# Altium PCB msr50.PcbDoc (part 5 of 8)
Units mil, origin at the board's own origin, x right, y up, seen from the top; angles counter-clockwise.
Board outline 3925 x 3925 mil, 2 copper layers (TopLayer, BottomLayer); 109 components, 122 nets, 846 pads, 52 vias.
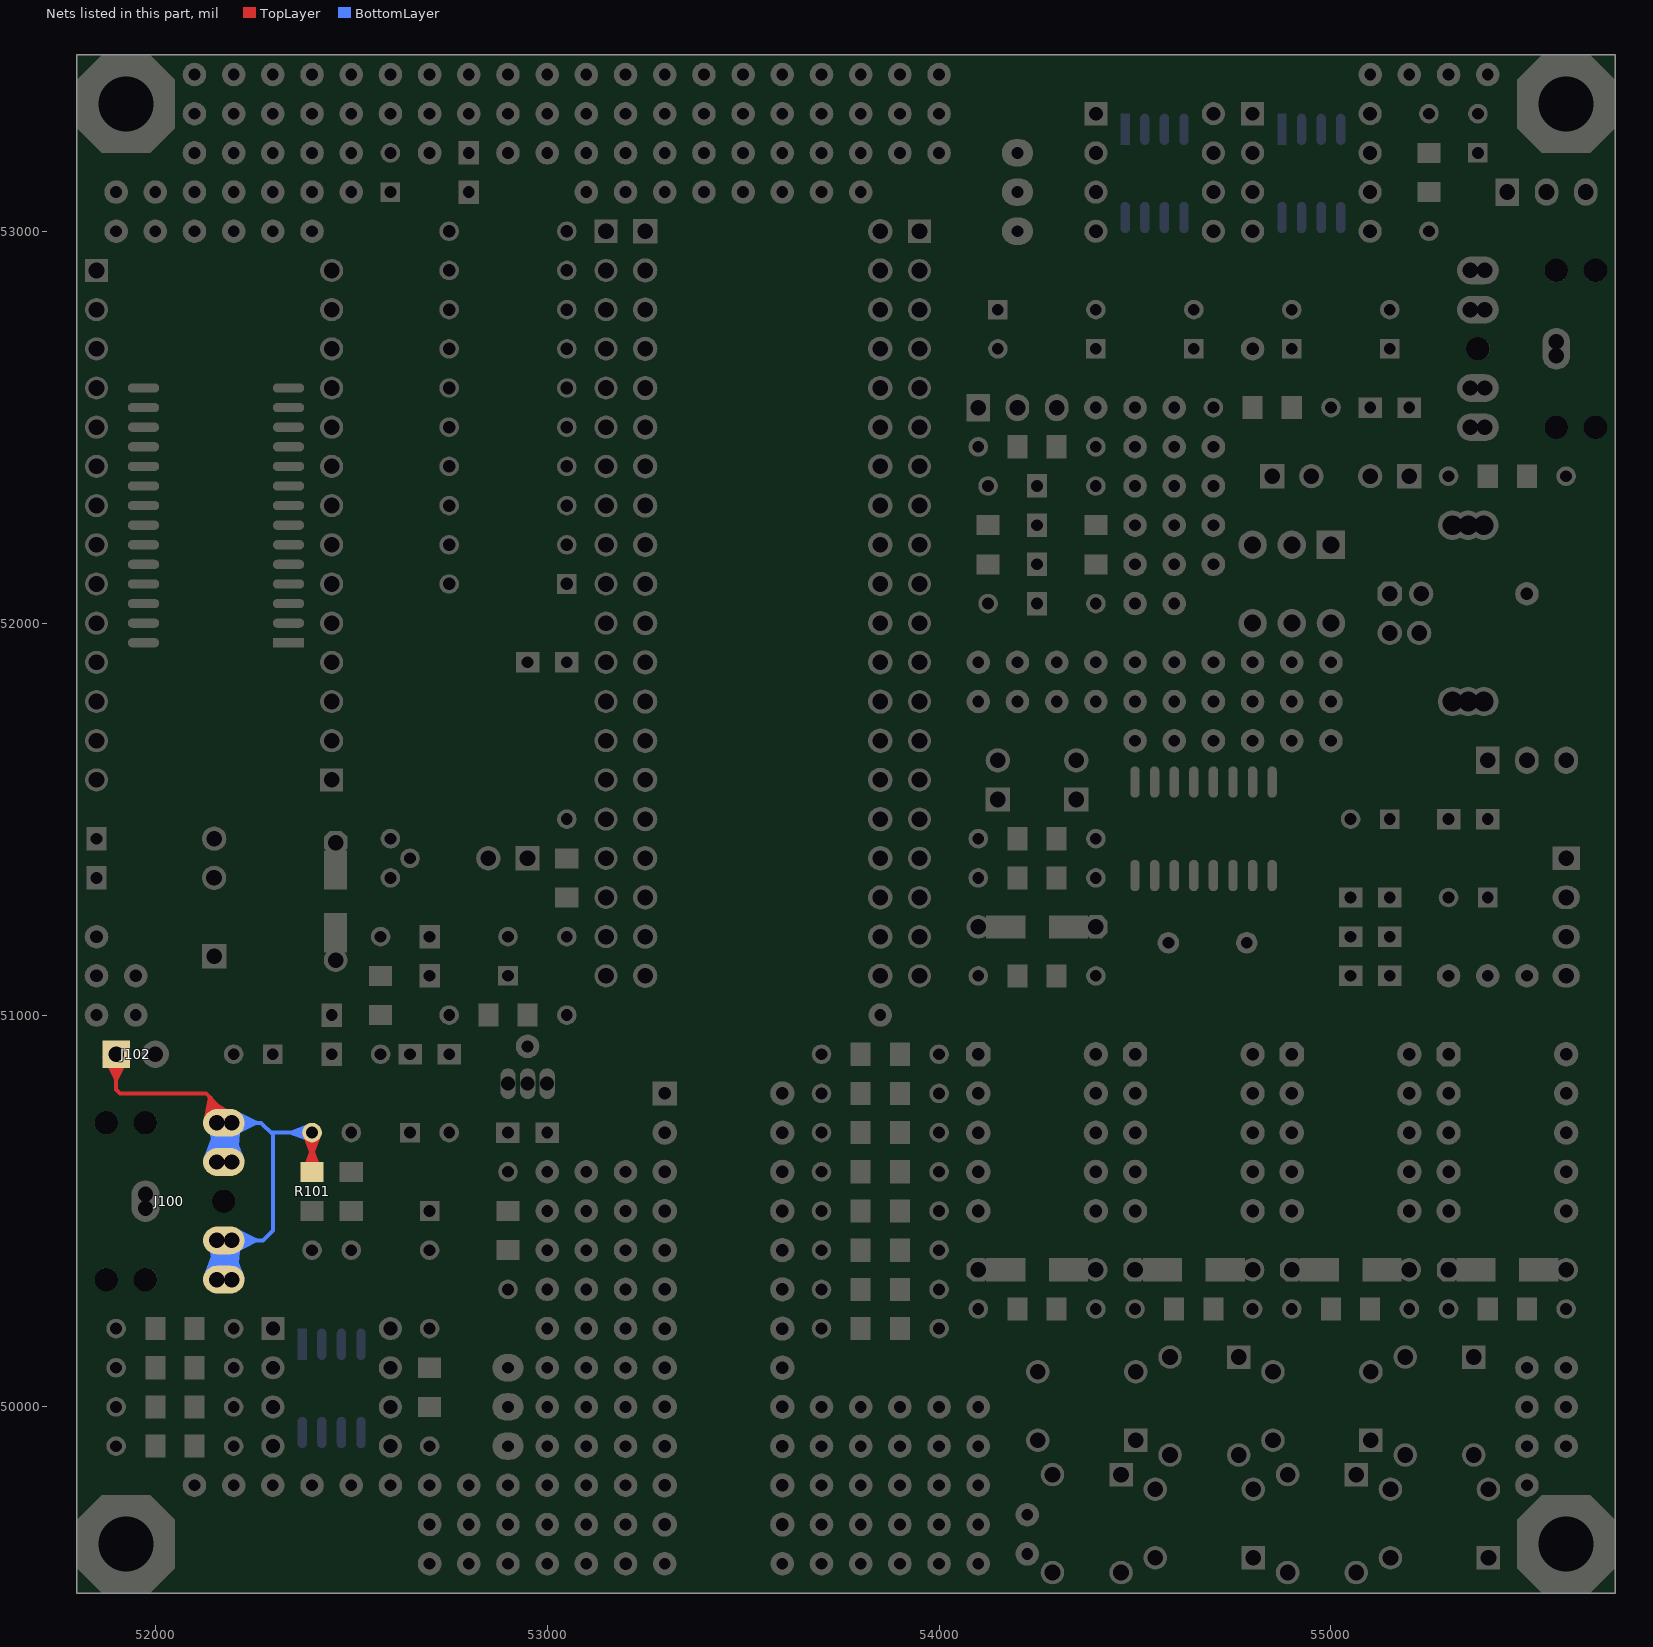
[diagram p5: the nets of this part, all layers, seen from the top]

## Via types
v1: diameter 30, hole 14, TopLayer to BottomLayer, 40 vias
v2: diameter 50, hole 28, TopLayer to BottomLayer, 12 vias

## Nets (pads, with @x,y where several pads share a name; then routed paths per layer and width w, separated by ;. In a path a pad name is that pad's centre, name@x,y a point inside that pad or via, vN(x,y) a via of type N, cw(c..) or ccw(c..) an arc to the next point about the centre after c; other vN are vias at no path point) (continued)
NetJ100_2: (continued)
  BottomLayer w10: J100.3@52186.39,50625.5 J100.2@52195.23,50702.91 ; J100.3@52186.4,50625.6 52194.45,50678.71 ; J100.2@52186.41,50724.23 52196.16,50664.11 ; J100.2@52186.38,50724.99 52190.73,50665.44 ; J100.2@52186.38,50725.16 52189.67,50669.78 ; J100.2@52186.38,50725.32 J100.3@52188.22,50658.46 ; J100.2@52186.41,50725.72 52185.83,50667.34 ; J100.2@52186.42,50725.89 52184.78,50668.55 ; J100.5@52186.45,50326.09 52197.6,50379.7 ; J100.4@52186.47,50423.76 52198.51,50370.79 ; J100.4@52186.45,50426.12 J100.5@52182.09,50359.79 ; J100.3@52186.45,50626.09 52197.6,50679.7 ; J100.2@52186.47,50723.76 52198.51,50670.79 ; J100.2@52186.45,50726.12 J100.3@52182.09,50659.79 ; J100.5@52186.5,50323.53 52180.99,50380.64 ; J100.5@52186.48,50326.33 52199.76,50383.59 ; J100.4@52186.5,50426.44 52181.3,50369.77 ; J100.3@52186.5,50623.53 52180.99,50680.64 ; J100.3@52186.48,50626.33 52199.76,50683.59 ; J100.2@52186.5,50726.44 52181.3,50669.77 ; J100.5@52186.53,50323.37 52180.25,50378.8 ; J100.4@52186.54,50426.67 52179.36,50367.87 ; J100.3@52186.53,50623.37 52180.25,50678.8 ; J100.2@52186.54,50726.67 52179.36,50667.87 ; J100.5@52186.61,50323.03 52176.96,50382.89 ; J100.5@52186.6,50323.08 52178.6,50377.34 ; J100.4@52186.59,50423.11 52203.09,50369.42 ; J100.4@52186.59,50426.91 52176.25,50361.98 ; J100.3@52186.61,50623.03 52176.96,50682.89 ; J100.3@52186.6,50623.08 52178.6,50677.34 ; J100.2@52186.59,50723.11 52203.09,50669.42 ; J100.2@52186.59,50726.91 52176.25,50661.98 ; J100.4@52186.77,50422.42 52208.23,50368.44 ; J100.2@52186.77,50722.42 52208.23,50668.44 ; J100.4@52186.78,50422.41 J100.4@52199.79,50395.4 ; J100.4@52186.78,50427.59 J100.4@52199.79,50454.6 ; J100.2@52186.78,50722.41 J100.2@52199.79,50695.4 ; J100.2@52186.78,50727.59 J100.2@52199.79,50754.6 ; J100.5@52192.72,50325 J100.4@52195.23,50402.91 ; J100.4@52192.72,50425 52258.15,50425 ; J100.3@52192.72,50625 J100.2@52195.23,50702.91 ; J100.2@52192.72,50725 52258.15,50725 ; J100.4@52193.55,50414.6 52258.15,50425 ; J100.4@52193.55,50435.4 52258.15,50425 ; J100.2@52193.55,50714.6 52258.15,50725 ; J100.2@52193.55,50735.4 52258.15,50725 ; J100.5@52193.78,50333.05 J100.4@52157.28,50392.23 ; J100.4@52193.78,50416.95 J100.5@52157.28,50357.77 ; J100.3@52193.78,50633.05 J100.2@52157.28,50692.23 ; J100.2@52193.78,50716.95 J100.3@52157.28,50657.77 ; J100.5@52193.9,50332.76 J100.4@52155.75,50398.74 ; J100.3@52193.9,50632.76 J100.2@52155.75,50698.74 ; J100.5@52194.53,50331 J100.4@52162.05,50401.91 ; J100.3@52194.53,50631 J100.2@52162.05,50701.91 ; J100.5@52194.79,50333.62 J100.5@52222.74,50329.98 ; J100.3@52194.79,50633.62 J100.3@52222.74,50629.98 ; J100.5@52195.03,50329.03 J100.4@52169.49,50404.1 ; J100.3@52195.03,50629.03 J100.2@52169.49,50704.1 ; J100.5@52195.34,50326.92 J100.4@52177.71,50405.04 ; J100.3@52195.34,50626.92 J100.2@52177.71,50705.04 ; J100.4@52195.41,50416.39 52253.35,50423.44 ; J100.4@52195.41,50433.61 52253.35,50426.56 ; J100.2@52195.41,50716.39 52253.35,50723.44 ; J100.2@52195.41,50733.61 52253.35,50726.56 ; J100.5@52195.43,50324.75 J100.4@52186.2,50404.66 ; J100.4@52195.47,50416.39 52249.97,50423.68 ; J100.4@52195.47,50433.61 52249.97,50426.32 ; J100.3@52195.43,50624.75 J100.2@52186.2,50704.66 ; J100.2@52195.47,50716.39 52249.97,50723.68 ; J100.2@52195.47,50733.61 52249.97,50726.32 ; J100.4@52195.53,50433.61 52257.25,50425.46 ; J100.2@52195.53,50733.61 52257.25,50725.46 ; J100.4@52195.59,50416.4 52258.15,50425 ; J100.4@52195.59,50433.6 52258.15,50425 ; J100.2@52195.59,50716.4 52258.15,50725 ; J100.2@52195.59,50733.6 52258.15,50725 ; J100.4@52195.66,50416.4 52257.25,50425.46 ; J100.2@52195.66,50716.4 52257.25,50725.46 ; J100.4@52195.87,50416.42 52253.35,50426.56 ; J100.4@52195.87,50433.58 52253.35,50423.44 ; J100.2@52195.87,50716.42 52253.35,50726.56 ; J100.2@52195.87,50733.58 52253.35,50723.44 ; J100.4@52195.91,50404.82 52258.15,50425 ; J100.4@52195.88,50416.42 52249.97,50426.32 ; J100.4@52195.88,50433.58 52249.97,50423.68 ; J100.4@52195.91,50445.18 52258.15,50425 ; J100.2@52195.91,50704.82 52258.15,50725 ; J100.2@52195.88,50716.42 52249.97,50726.32 ; J100.2@52195.88,50733.58 52249.97,50723.68 ; J100.2@52195.91,50745.18 52258.15,50725 ; J100.4@52197.48,50406.54 52253.35,50423.44 ; J100.4@52197.48,50443.46 52253.35,50426.56 ; J100.2@52197.48,50706.54 52253.35,50723.44 ; J100.2@52197.48,50743.46 52253.35,50726.56 ; J100.4@52197.65,50443.43 52257.25,50425.46 ; J100.2@52197.65,50743.43 52257.25,50725.46 ; J100.4@52197.71,50406.58 52249.97,50423.68 ; J100.4@52197.71,50443.42 52249.97,50426.32 ; J100.2@52197.71,50706.58 52249.97,50723.68 ; J100.2@52197.71,50743.42 52249.97,50726.32 ; J100.4@52197.75,50406.58 52258.15,50425 ; J100.4@52197.75,50443.42 52258.15,50425 ; J100.2@52197.75,50706.58 52258.15,50725 ; J100.2@52197.75,50743.42 52258.15,50725 ; J100.5@52197.8,50316.85 J100.5@52222.74,50329.98 ; J100.3@52197.8,50616.85 J100.3@52222.74,50629.98 ; J100.4@52197.92,50406.61 52257.25,50425.46 ; J100.2@52197.92,50706.61 52257.25,50725.46 ; J100.5@52197.95,50343.39 J100.5@52222.74,50329.98 ; J100.3@52197.95,50643.39 J100.3@52222.74,50629.98 ; J100.4@52198.46,50406.7 52253.35,50426.56 ; J100.4@52198.46,50443.3 52253.35,50423.44 ; J100.2@52198.46,50706.7 52253.35,50726.56 ; J100.2@52198.46,50743.3 52253.35,50723.44 ; J100.4@52198.59,50406.73 52249.97,50426.32 ; J100.4@52198.59,50443.27 52249.97,50423.68 ; J100.2@52198.59,50706.73 52249.97,50726.32 ; J100.2@52198.59,50743.27 52249.97,50723.68 ; J100.5@52201.83,50330.27 52162.97,50373.58 ; J100.3@52201.83,50630.27 52162.97,50673.58 ; J100.5@52201.92,50330.15 52161.1,50377.77 ; J100.4@52201.92,50419.85 52161.1,50372.23 ; J100.3@52201.92,50630.15 52161.1,50677.77 ; J100.2@52201.92,50719.85 52161.1,50672.23 ; J100.5@52201.93,50330.13 52161.17,50377.99 ; J100.3@52201.93,50630.13 52161.17,50677.99 ; J100.5@52202.02,50330 52164.85,50374.72 ; J100.5@52202.02,50339.01 J100.4@52157.28,50392.23 ; J100.4@52202.02,50410.99 J100.5@52157.28,50357.77 ; J100.4@52202.02,50420 52164.85,50375.28 ; J100.3@52202.02,50630 52164.85,50674.72 ; J100.3@52202.02,50639.01 J100.2@52157.28,50692.23 ; J100.2@52202.02,50710.99 J100.3@52157.28,50657.77 ; J100.2@52202.02,50720 52164.85,50675.28 ; J100.4@52202.06,50420.05 52163.17,50372.15 ; J100.2@52202.06,50720.05 52163.17,50672.15 ; J100.5@52202.08,50329.91 52165.6,50374.94 ; J100.3@52202.08,50629.91 52165.6,50674.94 ; J100.5@52202.25,50329.67 52167.7,50375.34 ; J100.4@52202.25,50420.33 52167.7,50374.66 ; J100.3@52202.25,50629.67 52167.7,50675.34 ; J100.2@52202.25,50720.33 52167.7,50674.66 ; J100.5@52202.31,50329.57 52165.76,50379.83 ; J100.5@52202.32,50338.41 J100.4@52155.75,50398.74 ; J100.3@52202.31,50629.57 52165.76,50679.83 ; J100.3@52202.32,50638.41 J100.2@52155.75,50698.74 ; J100.5@52202.36,50329.5 52169.09,50375.68 ; J100.4@52202.34,50420.48 52168.72,50374.15 ; J100.3@52202.36,50629.5 52169.09,50675.68 ; J100.2@52202.34,50720.48 52168.72,50674.15 ; J100.5@52202.59,50329.09 52170.33,50379.86 ; J100.3@52202.59,50629.09 52170.33,50679.86 ; J100.4@52202.66,50421.04 52173.34,50373.76 ; J100.2@52202.66,50721.04 52173.34,50673.76 ; J100.5@52202.8,50328.68 52174.89,50377.66 ; J100.4@52202.78,50421.28 52171.06,50364.9 ; J100.3@52202.8,50628.68 52174.89,50677.66 ; J100.2@52202.78,50721.28 52171.06,50664.9 ; J100.5@52202.9,50328.45 52175.55,50380.35 ; J100.3@52202.9,50628.45 52175.55,50680.35 ; J100.4@52202.93,50421.63 52177.25,50372.26 ; J100.2@52202.93,50721.63 52177.25,50672.26 ; J100.5@52203,50328.22 52178.6,50377.34 ; J100.3@52203,50628.22 52178.6,50677.34 ; J100.5@52203.03,50328.14 52176.96,50382.89 ; J100.3@52203.03,50628.14 52176.96,50682.89 ; J100.5@52203.11,50327.92 52180.25,50378.8 ; J100.4@52203.09,50422 52176.25,50361.98 ; J100.3@52203.11,50627.92 52180.25,50678.8 ; J100.2@52203.09,50722 52176.25,50661.98 ; J100.5@52203.14,50325.36 J100.4@52195.23,50402.91 ; J100.4@52203.13,50422.12 52179.36,50367.87 ; J100.3@52203.14,50625.36 J100.2@52195.23,50702.91 ; J100.2@52203.13,50722.12 52179.36,50667.87 ; J100.5@52203.18,50327.73 52180.99,50380.64 ; J100.4@52203.19,50422.3 52181.3,50369.77 ; J100.3@52203.18,50627.73 52180.99,50680.64 ; J100.2@52203.19,50722.3 52181.3,50669.77 ; J100.5@52203.27,50327.45 52183.81,50378.01 ; J100.3@52203.27,50627.45 52183.81,50678.01 ; J100.5@52203.31,50327.29 52183.26,50383.76 ; J100.3@52203.31,50627.29 52183.26,50683.76 ; J100.5@52203.37,50327.07 52185.95,50379.6 ; J100.4@52203.33,50422.78 J100.5@52182.09,50359.79 ; J100.4@52203.34,50422.83 52184.78,50368.55 ; J100.3@52203.37,50627.07 52185.95,50679.6 ; J100.2@52203.33,50722.78 J100.3@52182.09,50659.79 ; J100.2@52203.34,50722.83 52184.78,50668.55 ; J100.5@52203.4,50326.94 52186.55,50380.7 ; J100.4@52203.39,50423.02 52185.83,50367.34 ; J100.3@52203.4,50626.94 52186.55,50680.7 ; J100.2@52203.39,50723.02 52185.83,50667.34 ; J100.5@52203.47,50326.61 52189.23,50378.46 ; J100.5@52203.45,50335.81 J100.4@52162.05,50401.91 ; J100.3@52203.47,50626.61 52189.23,50678.46 ; J100.3@52203.45,50635.81 J100.2@52162.05,50701.91 ; J100.5@52203.52,50326.29 52190.1,50386.03 ; J100.4@52203.49,50423.51 52189.67,50369.78 ; J100.4@52203.5,50423.58 J100.5@52188.22,50358.46 ; J100.4@52203.52,50426.34 52208.23,50368.44 ; J100.3@52203.52,50626.29 52190.1,50686.03 ; J100.2@52203.49,50723.51 52189.67,50669.78 ; J100.2@52203.5,50723.58 J100.3@52188.22,50658.46 ; J100.2@52203.52,50726.34 52208.23,50668.44 ; J100.5@52203.55,50326.11 52192.12,50380.56 ; J100.5@52203.54,50326.18 52191.58,50381.19 ; J100.4@52203.53,50423.76 52190.73,50365.44 ; J100.3@52203.55,50626.11 52192.12,50680.56 ; J100.3@52203.54,50626.18 52191.58,50681.19 ; J100.2@52203.53,50723.76 52190.73,50665.44 ; J100.5@52203.62,50324.93 52199.76,50383.59 ; J100.5@52203.62,50325.27 52197.6,50379.7 ; J100.5@52203.61,50325.45 J100.4@52195.23,50402.91 ; J100.5@52203.59,50325.78 52194.45,50378.71 ; J100.4@52203.58,50424.18 52194.21,50371.21 ; J100.4@52203.6,50424.42 J100.5@52194.82,50357.93 ; J100.4@52203.61,50424.55 52196.16,50364.11 ; J100.4@52203.62,50425.14 J100.4@52199.79,50395.4 ; J100.4@52203.6,50425.58 52203.09,50369.42 ; J100.3@52203.62,50624.93 52199.76,50683.59 ; J100.3@52203.62,50625.27 52197.6,50679.7 ; J100.3@52203.61,50625.45 J100.2@52195.23,50702.91 ; J100.3@52203.59,50625.78 52194.45,50678.71 ; J100.2@52203.58,50724.18 52194.21,50671.21 ; J100.2@52203.6,50724.42 J100.3@52194.82,50657.93 ; J100.2@52203.61,50724.55 52196.16,50664.11 ; J100.2@52203.62,50725.14 J100.2@52199.79,50695.4 ; J100.2@52203.6,50725.58 52203.09,50669.42 ; J100.5@52204.16,50308.79 J100.5@52222.74,50329.98 ; J100.3@52204.16,50608.79 J100.3@52222.74,50629.98 ; J100.5@52204.39,50332.9 J100.4@52169.49,50404.1 ; J100.3@52204.39,50632.9 J100.2@52169.49,50704.1 ; J100.5@52205.06,50329.77 J100.4@52177.71,50405.04 ; J100.3@52205.06,50629.77 J100.2@52177.71,50705.04 ; J100.5@52205.39,50326.54 J100.4@52186.2,50404.66 ; J100.3@52205.39,50626.54 J100.2@52186.2,50704.66 ; J100.5@52208.24,50338.1 52158.48,50375.14 ; J100.3@52208.24,50638.1 52158.48,50675.14 ; J100.5@52208.32,50338.02 52154.09,50380.19 ; J100.3@52208.32,50638.02 52154.09,50680.19 ; J100.5@52208.71,50337.61 52162.97,50373.58 ; J100.3@52208.71,50637.61 52162.97,50673.58 ; J100.5@52209,50337.28 52161.1,50377.77 ; J100.4@52209,50412.72 52161.1,50372.23 ; J100.3@52209,50637.28 52161.1,50677.77 ; J100.2@52209,50712.72 52161.1,50672.23 ; J100.5@52209.04,50337.23 52161.17,50377.99 ; J100.3@52209.04,50637.23 52161.17,50677.99 ; J100.5@52209.17,50337.08 52164.85,50374.72 ; J100.4@52209.17,50412.92 52164.85,50375.28 ; J100.3@52209.17,50637.08 52164.85,50674.72 ; J100.2@52209.17,50712.92 52164.85,50675.28 ; J100.5@52209.32,50336.9 52165.6,50374.94 ; J100.4@52209.32,50413.1 52163.17,50372.15 ; J100.3@52209.32,50636.9 52165.6,50674.94 ; J100.2@52209.32,50713.1 52163.17,50672.15 ; J100.5@52209.71,50336.42 52167.7,50375.34 ; J100.4@52209.71,50413.58 52167.7,50374.66 ; J100.3@52209.71,50636.42 52167.7,50675.34 ; J100.2@52209.71,50713.58 52167.7,50674.66 ; J100.4@52209.93,50413.87 52168.72,50374.15 ; J100.2@52209.93,50713.87 52168.72,50674.15 ; J100.5@52210.18,50335.78 52169.98,50376.33 ; J100.3@52210.18,50635.78 52169.98,50676.33 ; J100.5@52210.23,50335.72 52168.28,50379.15 ; J100.4@52210.23,50414.28 52168.28,50370.85 ; J100.4@52210.27,50414.34 52166.76,50368.31 ; J100.3@52210.23,50635.72 52168.28,50679.15 ; J100.2@52210.23,50714.28 52168.28,50670.85 ; J100.2@52210.27,50714.34 52166.76,50668.31 ; J100.5@52210.6,50335.17 52170.33,50379.86 ; J100.3@52210.6,50635.17 52170.33,50679.86 ; J100.4@52210.7,50414.98 52173.34,50373.76 ; J100.2@52210.7,50714.98 52173.34,50673.76 ; J100.5@52210.78,50334.89 52173.67,50376.54 ; J100.3@52210.78,50634.89 52173.67,50676.54 ; J100.5@52210.85,50334.78 52171.06,50381.53 ; J100.3@52210.85,50634.78 52171.06,50681.53 ; J100.5@52211.06,50334.43 52174.89,50377.66 ; J100.3@52211.06,50634.43 52174.89,50677.66 ; J100.4@52211.13,50415.69 52171.06,50364.9 ; J100.2@52211.13,50715.69 52171.06,50664.9 ; J100.5@52211.37,50333.88 52175.55,50380.35 ; J100.3@52211.37,50633.88 52175.55,50680.35 ; J100.4@52211.41,50416.19 52177.25,50372.26 ; J100.2@52211.41,50716.19 52177.25,50672.26 ; J100.5@52211.57,50333.5 52178.6,50377.34 ; J100.3@52211.57,50633.5 52178.6,50677.34 ; J100.5@52211.72,50333.2 52176.96,50382.89 ; J100.3@52211.72,50633.2 52176.96,50682.89 ; J100.5@52211.89,50332.85 52180.25,50378.8 ; J100.4@52211.92,50417.22 52176.25,50361.98 ; J100.3@52211.89,50632.85 52180.25,50678.8 ; J100.2@52211.92,50717.22 52176.25,50661.98 ; J100.4@52211.96,50417.32 52179.36,50367.87 ; J100.2@52211.96,50717.32 52179.36,50667.87 ; J100.5@52212.08,50332.42 52180.99,50380.64 ; J100.4@52212.1,50417.62 52181.3,50369.77 ; J100.3@52212.08,50632.42 52180.99,50680.64 ; J100.2@52212.1,50717.62 52181.3,50669.77 ; J100.5@52212.29,50331.92 52183.81,50378.01 ; J100.3@52212.29,50631.92 52183.81,50678.01 ; J100.5@52212.47,50331.44 52183.26,50383.76 ; J100.3@52212.47,50631.44 52183.26,50683.76 ; J100.4@52212.54,50418.75 52184.78,50368.55 ; J100.2@52212.54,50718.75 52184.78,50668.55 ; J100.5@52212.6,50331.09 52185.95,50379.6 ; J100.4@52212.58,50418.86 J100.5@52182.09,50359.79 ; J100.3@52212.6,50631.09 52185.95,50679.6 ; J100.2@52212.58,50718.86 J100.3@52182.09,50659.79 ; J100.5@52212.7,50330.8 52186.55,50380.7 ; J100.4@52212.69,50419.18 52185.83,50367.34 ; J100.3@52212.7,50630.8 52186.55,50680.7 ; J100.2@52212.69,50719.18 52185.83,50667.34 ; J100.5@52212.89,50330.17 52189.23,50378.46 ; J100.3@52212.89,50630.17 52189.23,50678.46 ; J100.4@52212.97,50420.13 52189.67,50369.78 ; J100.2@52212.97,50720.13 52189.67,50669.78 ; J100.5@52213.05,50327.02 J100.4@52195.23,50402.91 ; J100.3@52213.05,50627.02 J100.2@52195.23,50702.91 ; J100.5@52213.12,50329.3 52190.1,50386.03 ; J100.4@52213.08,50420.55 J100.5@52188.22,50358.46 ; J100.3@52213.12,50629.3 52190.1,50686.03 ; J100.2@52213.08,50720.55 J100.3@52188.22,50658.46 ; J100.5@52213.17,50329.06 52192.12,50380.56 ; J100.5@52213.14,50329.19 52191.58,50381.19 ; J100.4@52213.14,50420.79 52190.73,50365.44 ; J100.3@52213.17,50629.06 52192.12,50680.56 ; J100.3@52213.14,50629.19 52191.58,50681.19 ; J100.2@52213.14,50720.79 52190.73,50665.44 ; J100.5@52213.31,50328.42 52194.45,50378.71 ; J100.4@52213.29,50421.51 52194.21,50371.21 ; J100.3@52213.31,50628.42 52194.45,50678.71 ; J100.2@52213.29,50721.51 52194.21,50671.21 ; J100.4@52213.4,50422.12 J100.4@52199.79,50395.4 ; J100.4@52213.4,50427.88 J100.4@52199.79,50454.6 ; J100.2@52213.4,50722.12 J100.2@52199.79,50695.4 ; J100.2@52213.4,50727.88 J100.2@52199.79,50754.6 ; J100.4@52213.43,50422.37 J100.5@52194.82,50357.93 ; J100.4@52213.45,50422.51 52196.16,50364.11 ; J100.2@52213.43,50722.37 J100.3@52194.82,50657.93 ; J100.2@52213.45,50722.51 52196.16,50664.11 ; J100.5@52213.49,50327.17 J100.4@52195.23,50402.91 ; J100.5@52213.48,50327.29 52197.6,50379.7 ; J100.4@52213.51,50423 52198.51,50370.79 ; J100.3@52213.49,50627.17 J100.2@52195.23,50702.91 ; J100.3@52213.48,50627.29 52197.6,50679.7 ; J100.2@52213.51,50723 52198.51,50670.79 ; J100.5@52213.57,50326.45 52199.76,50383.59 ; J100.3@52213.57,50626.45 52199.76,50683.59 ; J100.4@52213.62,50424.59 52203.09,50369.42 ; J100.4@52213.58,50426.28 52208.23,50368.44 ; J100.2@52213.62,50724.59 52203.09,50669.42 ; J100.2@52213.58,50726.28 52208.23,50668.44 ; 52300,50695 52270,50725 J100.2A@52195,50725 ; R101.1@52375,50700 52300,50700 52300,50450 52275,50425 J100.4A@52195,50425 ; R101.1@52396.36,50680.33 52345,50700 ; R101.1@52396.36,50719.67 52345,50700 ; R101.1@52399.09,50690.04 52345,50700 ; R101.1@52399.09,50709.96 52345,50700 ; R101.1@52400,50700 52345,50700 ; J100.5@52139.24,50329.6 52161.17,50377.99 ; J100.5@52139.24,50329.6 52161.17,50377.99 ; J100.5@52139.24,50329.59 52161.1,50377.77 ; J100.5@52139.24,50329.59 52161.1,50377.77 ; J100.5@52139.24,50329.6 52162.11,50381.58 ; J100.3@52139.24,50629.6 52161.17,50677.99 ; J100.3@52139.24,50629.6 52161.17,50677.99 ; J100.3@52139.24,50629.59 52161.1,50677.77 ; J100.3@52139.24,50629.59 52161.1,50677.77 ; J100.3@52139.24,50629.6 52162.11,50681.58 ; J100.5@52139.54,50330.64 52162.97,50373.58 ; J100.5@52139.54,50330.64 52162.97,50373.58 ; J100.5@52139.54,50330.66 52164.61,50378.55 ; J100.3@52139.54,50630.64 52162.97,50673.58 ; J100.3@52139.54,50630.64 52162.97,50673.58 ; J100.3@52139.54,50630.66 52164.61,50678.55 ; J100.5@52140.14,50332.27 52169.69,50378.15 ; J100.5@52140.13,50332.24 52170.33,50379.86 ; J100.5@52140.13,50332.24 52170.33,50379.86 ; J100.5@52140.13,50332.25 52171.06,50381.53 ; J100.5@52140.13,50332.25 52171.06,50381.53 ; J100.3@52140.14,50632.27 52169.69,50678.15 ; J100.3@52140.13,50632.24 52170.33,50679.86 ; J100.3@52140.13,50632.24 52170.33,50679.86 ; J100.3@52140.13,50632.25 52171.06,50681.53 ; J100.3@52140.13,50632.25 52171.06,50681.53 ; J100.5@52140.76,50333.58 52175.55,50380.35 ; J100.5@52140.76,50333.58 52175.55,50380.35 ; J100.5@52140.77,50333.61 52173.67,50376.54 ; J100.5@52140.77,50333.61 52173.67,50376.54 ; J100.3@52140.76,50633.58 52175.55,50680.35 ; J100.3@52140.76,50633.58 52175.55,50680.35 ; J100.3@52140.77,50633.61 52173.67,50676.54 ; J100.3@52140.77,50633.61 52173.67,50676.54 ; J100.5@52140.86,50333.78 52174.89,50377.66 ; J100.5@52140.86,50333.78 52174.89,50377.66 ; J100.5@52140.87,50333.8 52176.91,50381.32 ; J100.3@52140.86,50633.78 52174.89,50677.66 ; J100.3@52140.86,50633.78 52174.89,50677.66 ; J100.3@52140.87,50633.8 52176.91,50681.32 ; 52148.29,50383.84 J100.5B@52157.28,50325 ; 52148.29,50683.84 J100.3B@52157.28,50625 ; J100.5@52148.66,50325.17 52154.09,50380.19 ; J100.5@52148.66,50325.17 52154.09,50380.19 ; J100.5@52148.66,50325.17 52154.05,50380.32 ; J100.3@52148.66,50625.17 52154.09,50680.19 ; J100.3@52148.66,50625.17 52154.09,50680.19 ; J100.3@52148.66,50625.17 52154.05,50680.32 ; J100.5@52148.72,50326.01 J100.4@52162.05,50401.91 ; J100.5@52148.72,50325.98 52160.17,50388.07 ; J100.5@52148.72,50326.02 52159.83,50382.56 ; J100.3@52148.72,50626.01 J100.2@52162.05,50701.91 ; J100.3@52148.72,50625.98 52160.17,50688.07 ; J100.3@52148.72,50626.02 52159.83,50682.56 ; J100.4@52148.82,50423.35 52163.17,50372.15 ; J100.4@52148.82,50423.35 52163.17,50372.15 ; J100.4@52148.82,50423.34 52164.92,50363.63 ; J100.2@52148.82,50723.35 52163.17,50672.15 ; J100.2@52148.82,50723.35 52163.17,50672.15 ; J100.2@52148.82,50723.34 52164.92,50663.63 ; J100.5@52148.84,50326.75 52162.97,50373.58 ; J100.5@52148.84,50326.75 52162.97,50373.58 ; J100.5@52148.85,50326.77 J100.4@52169.49,50404.1 ; J100.3@52148.84,50626.75 52162.97,50673.58 ; J100.3@52148.84,50626.75 52162.97,50673.58 ; J100.3@52148.85,50626.77 J100.2@52169.49,50704.1 ; J100.5@52148.9,50327.02 52164.85,50374.72 ; J100.5@52148.9,50327.02 52164.85,50374.72 ; J100.5@52148.89,50326.98 52165.76,50379.83 ; J100.5@52148.89,50326.98 52165.76,50379.83 ; J100.4@52148.91,50422.94 J100.5@52169.69,50356.67 ; J100.4@52148.91,50422.94 52166.76,50368.31 ; J100.4@52148.91,50422.94 52166.76,50368.31 ; J100.3@52148.9,50627.02 52164.85,50674.72 ; J100.3@52148.9,50627.02 52164.85,50674.72 ; J100.3@52148.89,50626.98 52165.76,50679.83 ; J100.3@52148.89,50626.98 52165.76,50679.83 ; J100.2@52148.91,50722.94 J100.3@52169.69,50656.67 ; J100.2@52148.91,50722.94 52166.76,50668.31 ; J100.2@52148.91,50722.94 52166.76,50668.31 ; J100.5@52148.93,50327.15 52167.42,50381.75 ; J100.5@52148.93,50327.14 52165.6,50374.94 ; J100.5@52148.93,50327.14 52165.6,50374.94 ; J100.3@52148.93,50627.15 52167.42,50681.75 ; J100.3@52148.93,50627.14 52165.6,50674.94 ; J100.3@52148.93,50627.14 52165.6,50674.94 ; J100.5@52148.98,50327.33 52167.92,50378.8 ; J100.5@52148.99,50327.37 52168.28,50379.15 ; J100.5@52148.99,50327.37 52168.28,50379.15 ; J100.4@52148.99,50422.63 52170.54,50363 ; J100.4@52148.99,50422.63 52168.28,50370.85 ; J100.4@52148.99,50422.63 52168.28,50370.85 ; J100.3@52148.98,50627.33 52167.92,50678.8 ; J100.3@52148.99,50627.37 52168.28,50679.15 ; J100.3@52148.99,50627.37 52168.28,50679.15 ; J100.2@52148.99,50722.63 52170.54,50663 ; J100.2@52148.99,50722.63 52168.28,50670.85 ; J100.2@52148.99,50722.63 52168.28,50670.85 ; J100.5@52149.08,50327.64 52169.09,50375.68 ; J100.5@52149.08,50327.64 52169.09,50375.68 ; J100.5@52149.08,50327.66 52171.06,50381.53 ; J100.5@52149.08,50327.66 52171.06,50381.53 ; J100.3@52149.08,50627.64 52169.09,50675.68 ; J100.3@52149.08,50627.64 52169.09,50675.68 ; J100.3@52149.08,50627.66 52171.06,50681.53 ; J100.3@52149.08,50627.66 52171.06,50681.53 ; J100.5@52149.35,50328.37 52174.92,50377.54 ; J100.5@52149.34,50328.36 52174.89,50377.66 ; J100.5@52149.34,50328.36 52174.89,50377.66 ; J100.3@52149.35,50628.37 52174.92,50677.54 ; J100.3@52149.34,50628.36 52174.89,50677.66 ; J100.3@52149.34,50628.36 52174.89,50677.66 ; 52149.67,50379.89 J100.5B@52157.28,50325 ; 52149.67,50679.89 J100.3B@52157.28,50625 ; J100.4@52150.43,50394.68 J100.5B@52157.28,50325 ; J100.2@52150.43,50694.68 J100.3B@52157.28,50625 ; 52150.93,50366.11 J100.4B@52157.28,50425 ; 52150.93,50666.11 J100.2B@52157.28,50725 ; 52153.1,50380.78 J100.5B@52157.28,50325 ; 52153.1,50680.78 J100.3B@52157.28,50625 ; 52153.58,50365.06 J100.4B@52157.28,50425 ; 52153.58,50665.06 J100.2B@52157.28,50725 ; 52154.05,50380.32 J100.5B@52157.28,50325 ; 52154.05,50380.32 J100.5@52165.83,50326.17 ; 52154.05,50380.32 J100.5@52175.43,50329.19 ; 52154.05,50680.32 J100.3B@52157.28,50625 ; 52154.05,50680.32 J100.3@52165.83,50626.17 ; 52154.05,50680.32 J100.3@52175.43,50629.19 ; 52154.09,50380.19 J100.5B@52157.28,50325 ; 52154.09,50380.19 J100.5@52165.83,50326.17 ; 52154.09,50380.19 J100.5@52175.43,50329.19 ; 52154.09,50380.19 52138.78,50327.07 52154.09,50380.19 ; 52154.09,50380.19 J100.5B@52157.28,50325 ; 52154.09,50380.19 J100.5@52165.83,50326.17 ; 52154.09,50380.19 J100.5@52175.43,50329.19 ; 52154.09,50380.19 J100.5A@52195,50325 ; 52154.09,50380.19 52201.59,50330.56 52158.48,50375.14 ; 52154.09,50380.19 J100.5@52187.77,50320.31 ; 52154.09,50680.19 J100.3B@52157.28,50625 ; 52154.09,50680.19 J100.3@52165.83,50626.17 ; 52154.09,50680.19 J100.3@52175.43,50629.19 ; 52154.09,50680.19 52138.78,50627.07 52154.09,50680.19 ; 52154.09,50680.19 J100.3B@52157.28,50625 ; 52154.09,50680.19 J100.3@52165.83,50626.17 ; 52154.09,50680.19 J100.3@52175.43,50629.19 ; 52154.09,50680.19 J100.3A@52195,50625 ; 52154.09,50680.19 52201.59,50630.56 52158.48,50675.14 ; 52154.09,50680.19 J100.3@52187.77,50620.31 ; 52154.64,50384.47 J100.5B@52157.28,50325 ; 52154.64,50384.47 J100.5@52165.85,50326.01 ; 52154.64,50684.47 J100.3B@52157.28,50625 ; 52154.64,50684.47 J100.3@52165.85,50626.01 ; 52155.14,50369.28 J100.4B@52157.28,50425 ; 52155.14,50369.28 52148.67,50424.66 52155.31,50365.95 ; 52155.14,50380.72 J100.5B@52157.28,50325 ; 52155.14,50380.72 J100.5@52165.85,50326 ; 52155.14,50669.28 J100.2B@52157.28,50725 ; 52155.14,50669.28 52148.67,50724.66 52155.31,50665.95 ; 52155.14,50680.72 J100.3B@52157.28,50625 ; 52155.14,50680.72 J100.3@52165.85,50626 ; 52155.32,50360.85 J100.4B@52157.28,50425 ; 52155.32,50360.85 52138.78,50422.86 J100.5@52155.99,50355.89 ; 52155.32,50360.85 52175.62,50421.74 52157.28,50371.38 ; 52155.31,50365.95 J100.4B@52157.28,50425 ; 52155.32,50660.85 J100.2B@52157.28,50725 ; 52155.32,50660.85 52138.78,50722.86 J100.3@52155.99,50655.89 ; 52155.32,50660.85 52175.62,50721.74 52157.28,50671.38 ; 52155.31,50665.95 J100.2B@52157.28,50725 ; 52155.48,50378.7 J100.5B@52157.28,50325 ; 52155.48,50378.7 J100.5@52165.85,50325.98 ; 52155.48,50678.7 J100.3B@52157.28,50625 ; 52155.48,50678.7 J100.3@52165.85,50625.98 ; J100.4@52155.75,50398.74 J100.5@52175,50325 ; J100.2@52155.75,50698.74 J100.3@52175,50625 ; J100.5@52155.99,50355.89 J100.4B@52157.28,50425 ; J100.5@52155.99,50355.89 52165.88,50424.3 52157.28,50371.38 ; J100.3@52155.99,50655.89 J100.2B@52157.28,50725 ; J100.3@52155.99,50655.89 52165.88,50724.3 52157.28,50671.38 ; 52156.78,50371.29 J100.4B@52157.28,50425 ; 52156.78,50378.71 J100.5B@52157.28,50325 ; 52156.78,50671.29 J100.2B@52157.28,50725 ; 52156.78,50678.71 J100.3B@52157.28,50625 ; J100.5B@52157.28,50325 52182.74,50375.33 ; J100.5B@52157.28,50325 52161.17,50377.99 ; J100.5B@52157.28,50325 J100.5@52187.43,50320.87 ; J100.5B@52157.28,50325 52161.17,50377.99 ; J100.5B@52157.28,50325 J100.5@52187.77,50320.31 ; J100.5B@52157.28,50325 52158.48,50375.14 ; J100.5B@52157.28,50325 J100.5@52187.69,50320.42 ; J100.5B@52157.28,50325 52158.48,50375.14 ; J100.5B@52157.28,50325 52162.97,50373.58 ; J100.5B@52157.28,50325 J100.5@52187.47,50320.8 ; J100.5B@52157.28,50325 52162.97,50373.58 ; J100.5B@52157.28,50325 52161.1,50377.77 ; J100.5B@52157.28,50325 J100.5@52187.44,50320.85 ; J100.5B@52157.28,50325 52161.1,50377.77 ; J100.5B@52157.28,50325 52164.85,50374.72 ; J100.5B@52157.28,50325 J100.5@52187.32,50321.09 ; J100.5B@52157.28,50325 52164.85,50374.72 ; J100.5B@52157.28,50325 52167.92,50378.8 ; J100.5B@52157.28,50325 52164.61,50378.55 ; J100.5B@52157.28,50325 52162.11,50381.58 ; J100.5B@52157.28,50325 52165.25,50382.86 ; J100.5B@52157.28,50325 J100.4@52162.05,50401.91 ; J100.5B@52157.28,50325 J100.5@52185.15,50327.42 ; J100.5B@52157.28,50325 52162.79,50379.28 ; J100.5B@52157.28,50325 52159.82,50378.72 ; J100.5B@52157.28,50325 52157.29,50381.23 ; J100.5B@52157.28,50325 52173.22,50377.95 ; J100.5B@52157.28,50325 52169.69,50378.15 ; J100.5B@52157.28,50325 52167.42,50381.75 ; J100.5B@52157.28,50325 52159.89,50382.89 ; J100.5B@52157.28,50325 52160.17,50388.07 ; J100.5B@52157.28,50325 52158.05,50379.43 ; J100.5B@52157.28,50325 52178.5,50376.79 ; J100.5B@52157.28,50325 52174.92,50377.54 ; J100.5B@52157.28,50325 52173.05,50381.71 ; J100.5B@52157.28,50325 52158.67,50379.36 ; J100.5B@52157.28,50325 52159.83,50382.56 ; J100.5B@52157.28,50325 52159.4,50387.34 ; J100.5B@52157.28,50325 52175.55,50380.35 ; J100.5B@52157.28,50325 J100.5@52186.68,50322.75 ; J100.5B@52157.28,50325 52175.55,50380.35 ; J100.5B@52157.28,50325 52170.33,50379.86 ; J100.5B@52157.28,50325 J100.5@52186.9,50322.04 ; J100.5B@52157.28,50325 52170.33,50379.86 ; J100.5B@52157.28,50325 52168.28,50379.15 ; J100.5B@52157.28,50325 J100.5@52187.02,50321.75 ; J100.5B@52157.28,50325 52168.28,50379.15 ; J100.5B@52157.28,50325 52165.76,50379.83 ; J100.5B@52157.28,50325 J100.5@52187.13,50321.48 ; J100.5B@52157.28,50325 52165.76,50379.83 ; J100.5B@52157.28,50325 52169.98,50376.33 ; J100.5B@52157.28,50325 J100.5@52186.99,50321.82 ; J100.5B@52157.28,50325 52169.98,50376.33 ; J100.5B@52157.28,50325 52173.67,50376.54 ; J100.5B@52157.28,50325 J100.5@52186.8,50322.33 ; J100.5B@52157.28,50325 52173.67,50376.54 ; J100.5B@52157.28,50325 52165.6,50374.94 ; J100.5B@52157.28,50325 J100.5@52187.26,50321.19 ; J100.5B@52157.28,50325 52165.6,50374.94 ; J100.5B@52157.28,50325 52169.09,50375.68 ; J100.5B@52157.28,50325 J100.5@52187.05,50321.67 ; J100.5B@52157.28,50325 52169.09,50375.68 ; J100.5B@52157.28,50325 52167.7,50375.34 ; J100.5B@52157.28,50325 J100.5@52187.13,50321.47 ; J100.5B@52157.28,50325 52167.7,50375.34 ; J100.5B@52157.28,50325 52189.17,50378.44 ; J100.5B@52157.28,50325 52171.06,50381.53 ; J100.5B@52157.28,50325 J100.5@52186.84,50322.2 ; J100.5B@52157.28,50325 52171.06,50381.53 ; J100.5B@52157.28,50325 52174.89,50377.66 ; J100.5B@52157.28,50325 J100.5@52186.73,50322.55 ; J100.5B@52157.28,50325 52174.89,50377.66 ; J100.5B@52157.28,50325 52178.6,50377.34 ; J100.5B@52157.28,50325 52180.95,50380.03 ; J100.5B@52157.28,50325 52176.95,50380.93 ; J100.5B@52157.28,50325 52180.25,50378.8 ; J100.5B@52157.28,50325 52183.81,50378.01 ; J100.5B@52157.28,50325 52182.8,50379.75 ; J100.5B@52157.28,50325 52191.65,50381.6 ; J100.5B@52157.28,50325 52187.28,50376.78 ; J100.5B@52157.28,50325 52171.01,50382.36 ; J100.5B@52157.28,50325 J100.4@52169.49,50404.1 ; J100.5B@52157.28,50325 J100.5@52185.34,50326.41 ; J100.5B@52157.28,50325 52176.91,50381.32 ; J100.5B@52157.28,50325 J100.4@52177.71,50405.04 ; J100.5B@52157.28,50325 J100.5@52185.43,50325.33 ; J100.5B@52157.28,50325 52182.71,50379.79 ; J100.5B@52157.28,50325 J100.5@52185.4,50324.22 ; J100.5B@52157.28,50325 52185.94,50378.56 ; J100.5B@52157.28,50325 52193.48,50375.96 ; J100.5B@52157.28,50325 52195.68,50375.02 ; J100.5B@52157.28,50325 52190.48,50377.23 ; J100.5B@52157.28,50325 52196.1,50374.9 ; J100.5B@52157.28,50325 52188.3,50378.19 ; J100.5B@52157.28,50325 52186.18,50378.67 ; J100.5B@52157.28,50325 52185.8,50378.73 ; J100.5B@52157.28,50325 52189.03,50377.65 ; J100.5B@52157.28,50325 52191.08,50376.98 ; J100.5B@52157.28,50325 J100.4B@52157.28,50425 ; J100.5@52157.28,50357.77 J100.4@52175,50425 ; 52157.28,50371.38 J100.4B@52157.28,50425 ; J100.4@52157.28,50392.23 J100.5@52175,50325 ; J100.4B@52157.28,50425 52181.94,50370.14 ; J100.4B@52157.28,50425 52182.68,50363.86 ; J100.4B@52157.28,50425 52163.17,50372.15 ; J100.4B@52157.28,50425 J100.4@52187.32,50428.92 ; J100.4B@52157.28,50425 52163.17,50372.15 ; J100.4B@52157.28,50425 52161.1,50372.23 ; J100.4B@52157.28,50425 J100.4@52187.44,50429.15 ; J100.4B@52157.28,50425 52161.1,50372.23 ; J100.4B@52157.28,50425 52164.85,50375.28 ; J100.4B@52157.28,50425 J100.4@52187.32,50428.91 ; J100.4B@52157.28,50425 52164.85,50375.28 ; J100.4B@52157.28,50425 52166.96,50363.34 ; J100.4B@52157.28,50425 52161.39,50361.73 ; J100.4B@52157.28,50425 52167.16,50371.55 ; J100.4B@52157.28,50425 52171.54,50371.29 ; J100.4B@52157.28,50425 52163.14,50368.83 ; J100.4B@52157.28,50425 52176.47,50370.43 ; J100.4B@52157.28,50425 52158.65,50366.65 ; J100.4B@52157.28,50425 J100.5@52169.69,50356.67 ; J100.4B@52157.28,50425 J100.5@52163.04,50355.84 ; J100.4B@52157.28,50425 52164.92,50363.63 ; J100.4B@52157.28,50425 52170.54,50363 ; J100.4B@52157.28,50425 52159.79,50364.79 ; J100.4B@52157.28,50425 52176.39,50363.06 ; J100.4B@52157.28,50425 52159.83,50367.44 ; J100.4B@52157.28,50425 52158.67,50370.64 ; J100.4B@52157.28,50425 52159.4,50362.66 ; J100.4B@52157.28,50425 52179.28,50369.54 ; J100.4B@52157.28,50425 J100.4@52199.79,50395.4 ; J100.4B@52157.28,50425 52168.28,50370.85 ; J100.4B@52157.28,50425 J100.4@52187.02,50428.25 ; J100.4B@52157.28,50425 52168.28,50370.85 ; J100.4B@52157.28,50425 52171.06,50364.9 ; J100.4B@52157.28,50425 J100.4@52186.8,50427.65 ; J100.4B@52157.28,50425 52171.36,50368.23 ; J100.4B@52157.28,50425 52166.76,50368.31 ; J100.4B@52157.28,50425 J100.4@52187.04,50428.31 ; J100.4B@52157.28,50425 52166.76,50368.31 ; J100.4B@52157.28,50425 52177.25,50372.26 ; J100.4B@52157.28,50425 J100.4@52186.64,50427.11 ; J100.4B@52157.28,50425 52177.25,50372.26 ; J100.4B@52157.28,50425 52173.34,50373.76 ; J100.4B@52157.28,50425 J100.4@52186.82,50427.73 ; J100.4B@52157.28,50425 52173.34,50373.76 ; J100.4B@52157.28,50425 52168.72,50374.15 ; J100.4B@52157.28,50425 J100.4@52187.06,50428.37 ; J100.4B@52157.28,50425 52168.72,50374.15 ; J100.4B@52157.28,50425 52167.7,50374.66 ; J100.4B@52157.28,50425 J100.4@52187.13,50428.53 ; J100.4B@52157.28,50425 52167.7,50374.66 ; J100.4B@52157.28,50425 52193.26,50373.94 ; J100.4B@52157.28,50425 52196.52,50375.38 ; J100.4B@52157.28,50425 52189.05,50372.29 ; J100.4B@52157.28,50425 52199.31,50376.74 ; J100.4B@52157.28,50425 52184.45,50370.8 ; J100.4B@52157.28,50425 52202.18,50378.27 ; J100.4B@52157.28,50425 52176.29,50368.7 ; J100.4B@52157.28,50425 52181.25,50369.58 ; J100.4B@52157.28,50425 52186,50370.84 ; J100.4B@52157.28,50425 52190.7,50372.49 ; J100.4B@52157.28,50425 52181.27,50370.06 ; J100.4B@52157.28,50425 52185.24,50370.97 ; J100.4B@52157.28,50425 52189.08,50372.14 ; J100.4B@52157.28,50425 52192.95,50373.61 ; J100.4B@52157.28,50425 52172.17,50365.72 ; J100.4B@52157.28,50425 52176.71,50368.7 ; J100.4B@52157.28,50425 52180.44,50371.92 ; J100.4B@52157.28,50425 52183.9,50374.71 ; J100.4B@52157.28,50425 J100.5@52176.13,50358.42 ; J100.4B@52157.28,50425 52181.97,50361.01 ; J100.4B@52157.28,50425 52186.92,50364.23 ; J100.4B@52157.28,50425 52191.14,50368.08 ; J100.4B@52157.28,50425 J100.4@52199.79,50454.6 ; J100.4B@52157.28,50425 J100.4A@52195,50425 ; J100.4B@52157.28,50425 J100.4A@52195,50425 ; J100.4B@52157.28,50425 J100.4@52194.01,50433.57 ; J100.4B@52157.28,50425 J100.4@52194.01,50416.43 ; J100.4B@52157.28,50425 J100.4@52190.4,50443.05 ; J100.4B@52157.28,50425 J100.4@52190.4,50406.95 ; J100.4B@52157.28,50425 J100.4@52175,50425 ; J100.3B@52157.28,50625 52182.74,50675.33 ; J100.3B@52157.28,50625 52161.17,50677.99 ; J100.3B@52157.28,50625 J100.3@52187.43,50620.87 ; J100.3B@52157.28,50625 52161.17,50677.99 ; J100.3B@52157.28,50625 J100.3@52187.77,50620.31 ; J100.3B@52157.28,50625 52158.48,50675.14 ; J100.3B@52157.28,50625 J100.3@52187.69,50620.42 ; J100.3B@52157.28,50625 52158.48,50675.14 ; J100.3B@52157.28,50625 52162.97,50673.58 ; J100.3B@52157.28,50625 J100.3@52187.47,50620.8 ; J100.3B@52157.28,50625 52162.97,50673.58 ; J100.3B@52157.28,50625 52161.1,50677.77 ; J100.3B@52157.28,50625 J100.3@52187.44,50620.85 ; J100.3B@52157.28,50625 52161.1,50677.77 ; J100.3B@52157.28,50625 52164.85,50674.72 ; J100.3B@52157.28,50625 J100.3@52187.32,50621.09 ; J100.3B@52157.28,50625 52164.85,50674.72 ; J100.3B@52157.28,50625 52167.92,50678.8 ; J100.3B@52157.28,50625 52164.61,50678.55 ; J100.3B@52157.28,50625 52162.11,50681.58 ; J100.3B@52157.28,50625 52165.25,50682.86 ; J100.3B@52157.28,50625 J100.2@52162.05,50701.91 ; J100.3B@52157.28,50625 J100.3@52185.15,50627.42 ; J100.3B@52157.28,50625 52162.79,50679.28 ; J100.3B@52157.28,50625 52159.82,50678.72 ; J100.3B@52157.28,50625 52157.29,50681.23 ; J100.3B@52157.28,50625 52173.22,50677.95 ; J100.3B@52157.28,50625 52169.69,50678.15 ; J100.3B@52157.28,50625 52167.42,50681.75 ; J100.3B@52157.28,50625 52159.89,50682.89 ; J100.3B@52157.28,50625 52160.17,50688.07 ; J100.3B@52157.28,50625 52158.05,50679.43 ; J100.3B@52157.28,50625 52178.5,50676.79 ; J100.3B@52157.28,50625 52174.92,50677.54 ; J100.3B@52157.28,50625 52173.05,50681.71 ; J100.3B@52157.28,50625 52159.83,50682.56 ; J100.3B@52157.28,50625 52159.4,50687.34 ; J100.3B@52157.28,50625 52158.67,50679.36 ; J100.3B@52157.28,50625 52175.55,50680.35 ; J100.3B@52157.28,50625 J100.3@52186.68,50622.75 ; J100.3B@52157.28,50625 52175.55,50680.35 ; J100.3B@52157.28,50625 52170.33,50679.86 ; J100.3B@52157.28,50625 J100.3@52186.9,50622.04 ; J100.3B@52157.28,50625 52170.33,50679.86 ; J100.3B@52157.28,50625 52168.28,50679.15 ; J100.3B@52157.28,50625 J100.3@52187.02,50621.75 ; J100.3B@52157.28,50625 52168.28,50679.15 ; J100.3B@52157.28,50625 52165.76,50679.83 ; J100.3B@52157.28,50625 J100.3@52187.13,50621.48 ; J100.3B@52157.28,50625 52165.76,50679.83 ; J100.3B@52157.28,50625 52169.98,50676.33 ; J100.3B@52157.28,50625 J100.3@52186.99,50621.82 ; J100.3B@52157.28,50625 52169.98,50676.33 ; J100.3B@52157.28,50625 52173.67,50676.54 ; J100.3B@52157.28,50625 J100.3@52186.8,50622.33 ; J100.3B@52157.28,50625 52173.67,50676.54 ; J100.3B@52157.28,50625 52165.6,50674.94 ; J100.3B@52157.28,50625 J100.3@52187.26,50621.19 ; J100.3B@52157.28,50625 52165.6,50674.94 ; J100.3B@52157.28,50625 52169.09,50675.68 ; J100.3B@52157.28,50625 J100.3@52187.05,50621.67 ; J100.3B@52157.28,50625 52169.09,50675.68 ; J100.3B@52157.28,50625 52167.7,50675.34 ; J100.3B@52157.28,50625 J100.3@52187.13,50621.47 ; J100.3B@52157.28,50625 52167.7,50675.34 ; J100.3B@52157.28,50625 52193.48,50675.96 ; J100.3B@52157.28,50625 52195.68,50675.02 ; J100.3B@52157.28,50625 52190.48,50677.23 ; J100.3B@52157.28,50625 52196.1,50674.9 ; J100.3B@52157.28,50625 52188.3,50678.19 ; J100.3B@52157.28,50625 52189.17,50678.44 ; J100.3B@52157.28,50625 52171.06,50681.53 ; J100.3B@52157.28,50625 J100.3@52186.84,50622.2 ; J100.3B@52157.28,50625 52171.06,50681.53 ; J100.3B@52157.28,50625 52174.89,50677.66 ; J100.3B@52157.28,50625 J100.3@52186.73,50622.55 ; J100.3B@52157.28,50625 52174.89,50677.66 ; J100.3B@52157.28,50625 52178.6,50677.34 ; J100.3B@52157.28,50625 52180.95,50680.03 ; J100.3B@52157.28,50625 52176.95,50680.93 ; J100.3B@52157.28,50625 52180.25,50678.8 ; J100.3B@52157.28,50625 52183.81,50678.01 ; J100.3B@52157.28,50625 52186.18,50678.67 ; J100.3B@52157.28,50625 52182.8,50679.75 ; J100.3B@52157.28,50625 52185.8,50678.73 ; J100.3B@52157.28,50625 52189.03,50677.65 ; J100.3B@52157.28,50625 52191.08,50676.98 ; J100.3B@52157.28,50625 52191.65,50681.6 ; J100.3B@52157.28,50625 52187.28,50676.78 ; J100.3B@52157.28,50625 52171.01,50682.36 ; J100.3B@52157.28,50625 J100.2@52169.49,50704.1 ; J100.3B@52157.28,50625 J100.3@52185.34,50626.41 ; J100.3B@52157.28,50625 52176.91,50681.32 ; J100.3B@52157.28,50625 J100.2@52177.71,50705.04 ; J100.3B@52157.28,50625 J100.3@52185.43,50625.33 ; J100.3B@52157.28,50625 52182.71,50679.79 ; J100.3B@52157.28,50625 J100.3@52185.4,50624.22 ; J100.3B@52157.28,50625 52185.94,50678.56 ; J100.3B@52157.28,50625 J100.2B@52157.28,50725 ; J100.3@52157.28,50657.77 J100.2@52175,50725 ; J100.2@52157.28,50692.23 J100.3@52175,50625 ; J100.2B@52157.28,50725 52181.94,50670.14 ; J100.2B@52157.28,50725 52182.68,50663.86 ; J100.2B@52157.28,50725 52163.17,50672.15 ; J100.2B@52157.28,50725 J100.2@52187.32,50728.92 ; J100.2B@52157.28,50725 52163.17,50672.15 ; J100.2B@52157.28,50725 52161.1,50672.23 ; J100.2B@52157.28,50725 J100.2@52187.44,50729.15 ; J100.2B@52157.28,50725 52161.1,50672.23 ; J100.2B@52157.28,50725 52164.85,50675.28 ; J100.2B@52157.28,50725 J100.2@52187.32,50728.91 ; J100.2B@52157.28,50725 52164.85,50675.28 ; J100.2B@52157.28,50725 52166.96,50663.34 ; J100.2B@52157.28,50725 52161.39,50661.73 ; J100.2B@52157.28,50725 52167.16,50671.55 ; J100.2B@52157.28,50725 52171.54,50671.29 ; J100.2B@52157.28,50725 52163.14,50668.83 ; J100.2B@52157.28,50725 52176.47,50670.43 ; J100.2B@52157.28,50725 52158.65,50666.65 ; J100.2B@52157.28,50725 J100.3@52169.69,50656.67 ; J100.2B@52157.28,50725 J100.3@52163.04,50655.84 ; J100.2B@52157.28,50725 52164.92,50663.63 ; J100.2B@52157.28,50725 52170.54,50663 ; J100.2B@52157.28,50725 52159.79,50664.79 ; J100.2B@52157.28,50725 52176.39,50663.06 ; J100.2B@52157.28,50725 52159.83,50667.44 ; J100.2B@52157.28,50725 52158.67,50670.64 ; J100.2B@52157.28,50725 52159.4,50662.66 ; J100.2B@52157.28,50725 52179.28,50669.54 ; J100.2B@52157.28,50725 J100.2@52199.79,50695.4 ; J100.2B@52157.28,50725 52168.28,50670.85 ; J100.2B@52157.28,50725 J100.2@52187.02,50728.25 ; J100.2B@52157.28,50725 52168.28,50670.85 ; J100.2B@52157.28,50725 52171.06,50664.9 ; J100.2B@52157.28,50725 J100.2@52186.8,50727.65 ; J100.2B@52157.28,50725 52171.36,50668.23 ; J100.2B@52157.28,50725 52166.76,50668.31 ; J100.2B@52157.28,50725 J100.2@52187.04,50728.31 ; J100.2B@52157.28,50725 52166.76,50668.31 ; J100.2B@52157.28,50725 52177.25,50672.26 ; J100.2B@52157.28,50725 J100.2@52186.64,50727.11 ; J100.2B@52157.28,50725 52177.25,50672.26 ; J100.2B@52157.28,50725 52173.34,50673.76 ; J100.2B@52157.28,50725 J100.2@52186.82,50727.73 ; J100.2B@52157.28,50725 52173.34,50673.76 ; J100.2B@52157.28,50725 52168.72,50674.15 ; J100.2B@52157.28,50725 J100.2@52187.06,50728.37 ; J100.2B@52157.28,50725 52168.72,50674.15 ; J100.2B@52157.28,50725 52167.7,50674.66 ; J100.2B@52157.28,50725 J100.2@52187.13,50728.53 ; J100.2B@52157.28,50725 52167.7,50674.66 ; J100.2B@52157.28,50725 52193.26,50673.94 ; J100.2B@52157.28,50725 52196.52,50675.38 ; J100.2B@52157.28,50725 52189.05,50672.29 ; J100.2B@52157.28,50725 52199.31,50676.74 ; J100.2B@52157.28,50725 52184.45,50670.8 ; J100.2B@52157.28,50725 52202.18,50678.27 ; J100.2B@52157.28,50725 52176.29,50668.7 ; J100.2B@52157.28,50725 52181.25,50669.58 ; J100.2B@52157.28,50725 52186,50670.84 ; J100.2B@52157.28,50725 52190.7,50672.49 ; J100.2B@52157.28,50725 52181.27,50670.06 ; J100.2B@52157.28,50725 52185.24,50670.97 ; J100.2B@52157.28,50725 52189.08,50672.14 ; J100.2B@52157.28,50725 52192.95,50673.61 ; J100.2B@52157.28,50725 52172.17,50665.72 ; J100.2B@52157.28,50725 52176.71,50668.7 ; J100.2B@52157.28,50725 52180.44,50671.92 ; J100.2B@52157.28,50725 52183.9,50674.71 ; J100.2B@52157.28,50725 J100.3@52176.13,50658.42 ; J100.2B@52157.28,50725 52181.97,50661.01 ; J100.2B@52157.28,50725 52186.92,50664.23 ; J100.2B@52157.28,50725 52191.14,50668.08 ; J100.2B@52157.28,50725 J100.2@52199.79,50754.6 ; J100.2B@52157.28,50725 J100.2A@52195,50725 ; J100.2B@52157.28,50725 J100.2A@52195,50725 ; J100.2B@52157.28,50725 J100.2@52194.01,50733.57 ; J100.2B@52157.28,50725 J100.2@52194.01,50716.43 ; J100.2B@52157.28,50725 J100.2@52190.4,50743.05 ; J100.2B@52157.28,50725 J100.2@52190.4,50706.95 ; J100.2B@52157.28,50725 J100.2@52175,50725 ; 52158.05,50379.43 J100.5@52165.89,50325.56 ; 52158.05,50679.43 J100.3@52165.89,50625.56 ; 52158.48,50375.14 J100.5@52165.89,50325.54 ; 52158.48,50375.14 52148.71,50325.95 52158.48,50375.14 ; 52158.48,50375.14 52175.66,50328.02 52158.48,50375.14 ; 52158.48,50375.14 52139.07,50328.89 52158.48,50375.14 ; 52158.48,50375.14 J100.5@52165.89,50325.54 ; 52158.48,50375.14 J100.5A@52195,50325 ; 52158.48,50375.14 J100.5@52187.69,50320.42 ; 52158.48,50675.14 J100.3@52165.89,50625.54 ; 52158.48,50675.14 52148.71,50625.95 52158.48,50675.14 ; 52158.48,50675.14 52175.66,50628.02 52158.48,50675.14 ; 52158.48,50675.14 52139.07,50628.89 52158.48,50675.14 ; 52158.48,50675.14 J100.3@52165.89,50625.54 ; 52158.48,50675.14 J100.3A@52195,50625 ; 52158.48,50675.14 J100.3@52187.69,50620.42 ; 52158.65,50366.65 52165.89,50424.57 52158.67,50370.64 ; 52158.67,50370.64 52148.71,50424.1 52159.4,50362.66 ; 52158.67,50370.64 52139.02,50421.34 52159.79,50364.79 ; 52158.67,50379.36 52148.71,50325.9 52159.4,50387.34 ; 52158.65,50666.65 52165.89,50724.57 52158.67,50670.64 ; 52158.67,50670.64 52148.71,50724.1 52159.4,50662.66 ; 52158.67,50670.64 52139.02,50721.34 52159.79,50664.79 ; 52158.67,50679.36 52148.71,50625.9 52159.4,50687.34 ; 52159.4,50387.34 52165.9,50325.3 52159.82,50378.72 ; 52159.4,50387.34 52175.78,50327.15 52159.89,50382.89 ; 52159.4,50687.34 52165.9,50625.3 52159.82,50678.72 ; 52159.4,50687.34 52175.78,50627.15 52159.89,50682.89 ; J100.5@52159.45,50333.35 J100.5@52187.02,50321.75 ; J100.5@52159.43,50333.35 J100.5@52186.99,50321.82 ; J100.5@52159.47,50333.34 J100.5@52187.05,50321.67 ; J100.3@52159.45,50633.35 J100.3@52187.02,50621.75 ; J100.3@52159.43,50633.35 J100.3@52186.99,50621.82 ; J100.3@52159.47,50633.34 J100.3@52187.05,50621.67 ; J100.5@52159.65,50333.29 J100.5@52187.43,50320.87 ; J100.5@52159.67,50333.29 J100.5@52187.47,50320.8 ; J100.5@52159.66,50333.29 J100.5@52187.44,50320.85 ; J100.3@52159.65,50633.29 J100.3@52187.43,50620.87 ; J100.3@52159.67,50633.29 J100.3@52187.47,50620.8 ; J100.3@52159.66,50633.29 J100.3@52187.44,50620.85 ; 52159.79,50364.79 52165.9,50424.74 52159.83,50367.44 ; 52159.79,50664.79 52165.9,50724.74 52159.83,50667.44 ; 52159.83,50382.56 52165.9,50325.26 52159.89,50382.89 ; 52159.83,50382.56 52139.06,50328.82 52159.89,50382.89 ; 52159.83,50682.56 52165.9,50625.26 52159.89,50682.89 ; 52159.83,50682.56 52139.06,50628.82 52159.89,50682.89 ; 52160.17,50388.07 J100.5@52175.81,50326.9 ; 52160.17,50688.07 J100.3@52175.81,50626.9 ; 52161.1,50372.23 52148.76,50423.68 52161.1,50372.23 ; 52161.1,50372.23 52165.91,50424.92 52161.1,50372.23 ; 52161.1,50372.23 52139.24,50420.41 52161.1,50372.23 ; 52161.1,50372.23 52175.8,50423.05 52161.1,50372.23 ; 52161.1,50372.23 J100.4A@52195,50425 ; 52161.1,50372.23 J100.4@52187.44,50429.15 ; 52161.1,50377.77 52165.9,50325.08 52161.1,50377.77 ; 52161.1,50377.77 52148.76,50326.32 52161.1,50377.77 ; 52161.1,50377.77 52175.8,50326.95 52161.1,50377.77 ; 52161.1,50377.77 J100.5A@52195,50325 ; 52161.1,50377.77 J100.5@52187.44,50320.85 ; 52161.1,50377.77 52178.01,50317.37 52162.97,50373.58 ; 52161.1,50672.23 52148.76,50723.68 52161.1,50672.23 ; 52161.1,50672.23 52165.9,50724.92 52161.1,50672.23 ; 52161.1,50672.23 52139.24,50720.41 52161.1,50672.23 ; 52161.1,50672.23 52175.8,50723.05 52161.1,50672.23 ; 52161.1,50672.23 J100.2A@52195,50725 ; 52161.1,50672.23 J100.2@52187.44,50729.15 ; 52161.1,50677.77 52165.9,50625.08 52161.1,50677.77 ; 52161.1,50677.77 52148.76,50626.32 52161.1,50677.77 ; 52161.1,50677.77 52175.8,50626.95 52161.1,50677.77 ; 52161.1,50677.77 J100.3A@52195,50625 ; 52161.1,50677.77 J100.3@52187.44,50620.85 ; 52161.1,50677.77 52178.01,50617.37 52162.97,50673.58 ; 52161.17,50377.99 52165.91,50325.07 52161.17,50377.99 ; 52161.17,50377.99 52148.76,50326.33 52161.17,50377.99 ; 52161.17,50377.99 J100.5@52175.81,50326.91 ; 52161.17,50377.99 J100.5@52175.81,50326.91 ; 52161.17,50377.99 J100.5A@52195,50325 ; 52161.17,50377.99 J100.5@52187.43,50320.87 ; 52161.17,50677.99 52165.91,50625.07 52161.17,50677.99 ; 52161.17,50677.99 52148.76,50626.33 52161.17,50677.99 ; 52161.17,50677.99 J100.3@52175.81,50626.91 ; 52161.17,50677.99 J100.3@52175.81,50626.91 ; 52161.17,50677.99 J100.3A@52195,50625 ; 52161.17,50677.99 J100.3@52187.43,50620.87 ; J100.4@52161.88,50443.05 J100.4A@52195,50425 ; J100.4@52161.89,50443.04 J100.4@52186.64,50427.11 ; J100.4@52161.88,50443.05 J100.4A@52195,50425 ; J100.2@52161.88,50743.05 J100.2A@52195,50725 ; J100.2@52161.89,50743.04 J100.2@52186.64,50727.11 ; J100.2@52161.88,50743.05 J100.2A@52195,50725 ; J100.4@52162.05,50401.91 J100.5@52175,50325 ; J100.4@52162.05,50401.91 J100.5@52185.15,50327.42 ; J100.2@52162.05,50701.91 J100.3@52175,50625 ; J100.2@52162.05,50701.91 J100.3@52185.15,50627.42 ; 52162.97,50373.58 52165.9,50324.76 52162.97,50373.58 ; 52162.97,50373.58 52175.85,50326.4 52162.97,50373.58 ; 52162.97,50373.58 J100.5A@52195,50325 ; 52162.97,50373.58 J100.5@52187.47,50320.8 ; 52162.97,50673.58 52165.9,50624.76 52162.97,50673.58 ; 52162.97,50673.58 52175.85,50626.4 52162.97,50673.58 ; 52162.97,50673.58 J100.3A@52195,50625 ; 52162.97,50673.58 J100.3@52187.47,50620.8 ; 52163.14,50368.83 J100.4@52165.9,50425.24 ; 52163.17,50372.15 J100.4@52165.9,50425.26 ; 52163.17,50372.15 52139.42,50419.73 52163.17,50372.15 ; 52163.17,50372.15 52175.87,50423.79 52163.17,50372.15 ; 52163.17,50372.15 J100.4@52165.9,50425.26 ; 52163.17,50372.15 J100.4A@52195,50425 ; 52163.17,50372.15 J100.4@52187.32,50428.92 ; 52163.14,50668.83 J100.2@52165.9,50725.24 ; 52163.17,50672.15 J100.2@52165.9,50725.26 ; 52163.17,50672.15 52139.42,50719.73 52163.17,50672.15 ; 52163.17,50672.15 52175.87,50723.79 52163.17,50672.15 ; 52163.17,50672.15 J100.2@52165.9,50725.26 ; 52163.17,50672.15 J100.2A@52195,50725 ; 52163.17,50672.15 J100.2@52187.32,50728.92 ; 52164.85,50374.72 J100.5@52165.89,50324.44 ; 52164.85,50374.72 52175.89,50325.66 52164.85,50374.72 ; 52164.85,50374.72 52139.71,50331.16 52164.85,50374.72 ; 52164.85,50374.72 J100.5@52165.89,50324.44 ; 52164.85,50374.72 J100.5A@52195,50325 ; 52164.85,50374.72 J100.5@52187.32,50321.09 ; 52164.85,50375.28 52148.9,50422.98 52164.85,50375.28 ; 52164.85,50375.28 52165.89,50425.56 52164.85,50375.28 ; 52164.85,50375.28 52139.71,50418.84 52164.85,50375.28 ; 52164.85,50375.28 52175.89,50424.34 52164.85,50375.28 ; 52164.85,50375.28 J100.4A@52195,50425 ; 52164.85,50375.28 J100.4@52187.32,50428.91 ; 52164.85,50674.72 J100.3@52165.89,50624.44 ; 52164.85,50674.72 52175.89,50625.66 52164.85,50674.72 ; 52164.85,50674.72 52139.71,50631.16 52164.85,50674.72 ; 52164.85,50674.72 J100.3@52165.89,50624.44 ; 52164.85,50674.72 J100.3A@52195,50625 ; 52164.85,50674.72 J100.3@52187.32,50621.09 ; 52164.85,50675.28 52148.9,50722.98 52164.85,50675.28 ; 52164.85,50675.28 52165.89,50725.56 52164.85,50675.28 ; 52164.85,50675.28 52139.71,50718.84 52164.85,50675.28 ; 52164.85,50675.28 52175.89,50724.34 52164.85,50675.28 ; 52164.85,50675.28 J100.2A@52195,50725 ; 52164.85,50675.28 J100.2@52187.32,50728.91 ; J100.4@52164.96,50428.92 52189.05,50372.29 ; J100.4@52164.96,50428.92 52189.08,50372.14